# Allegro board TEMA_1.brd
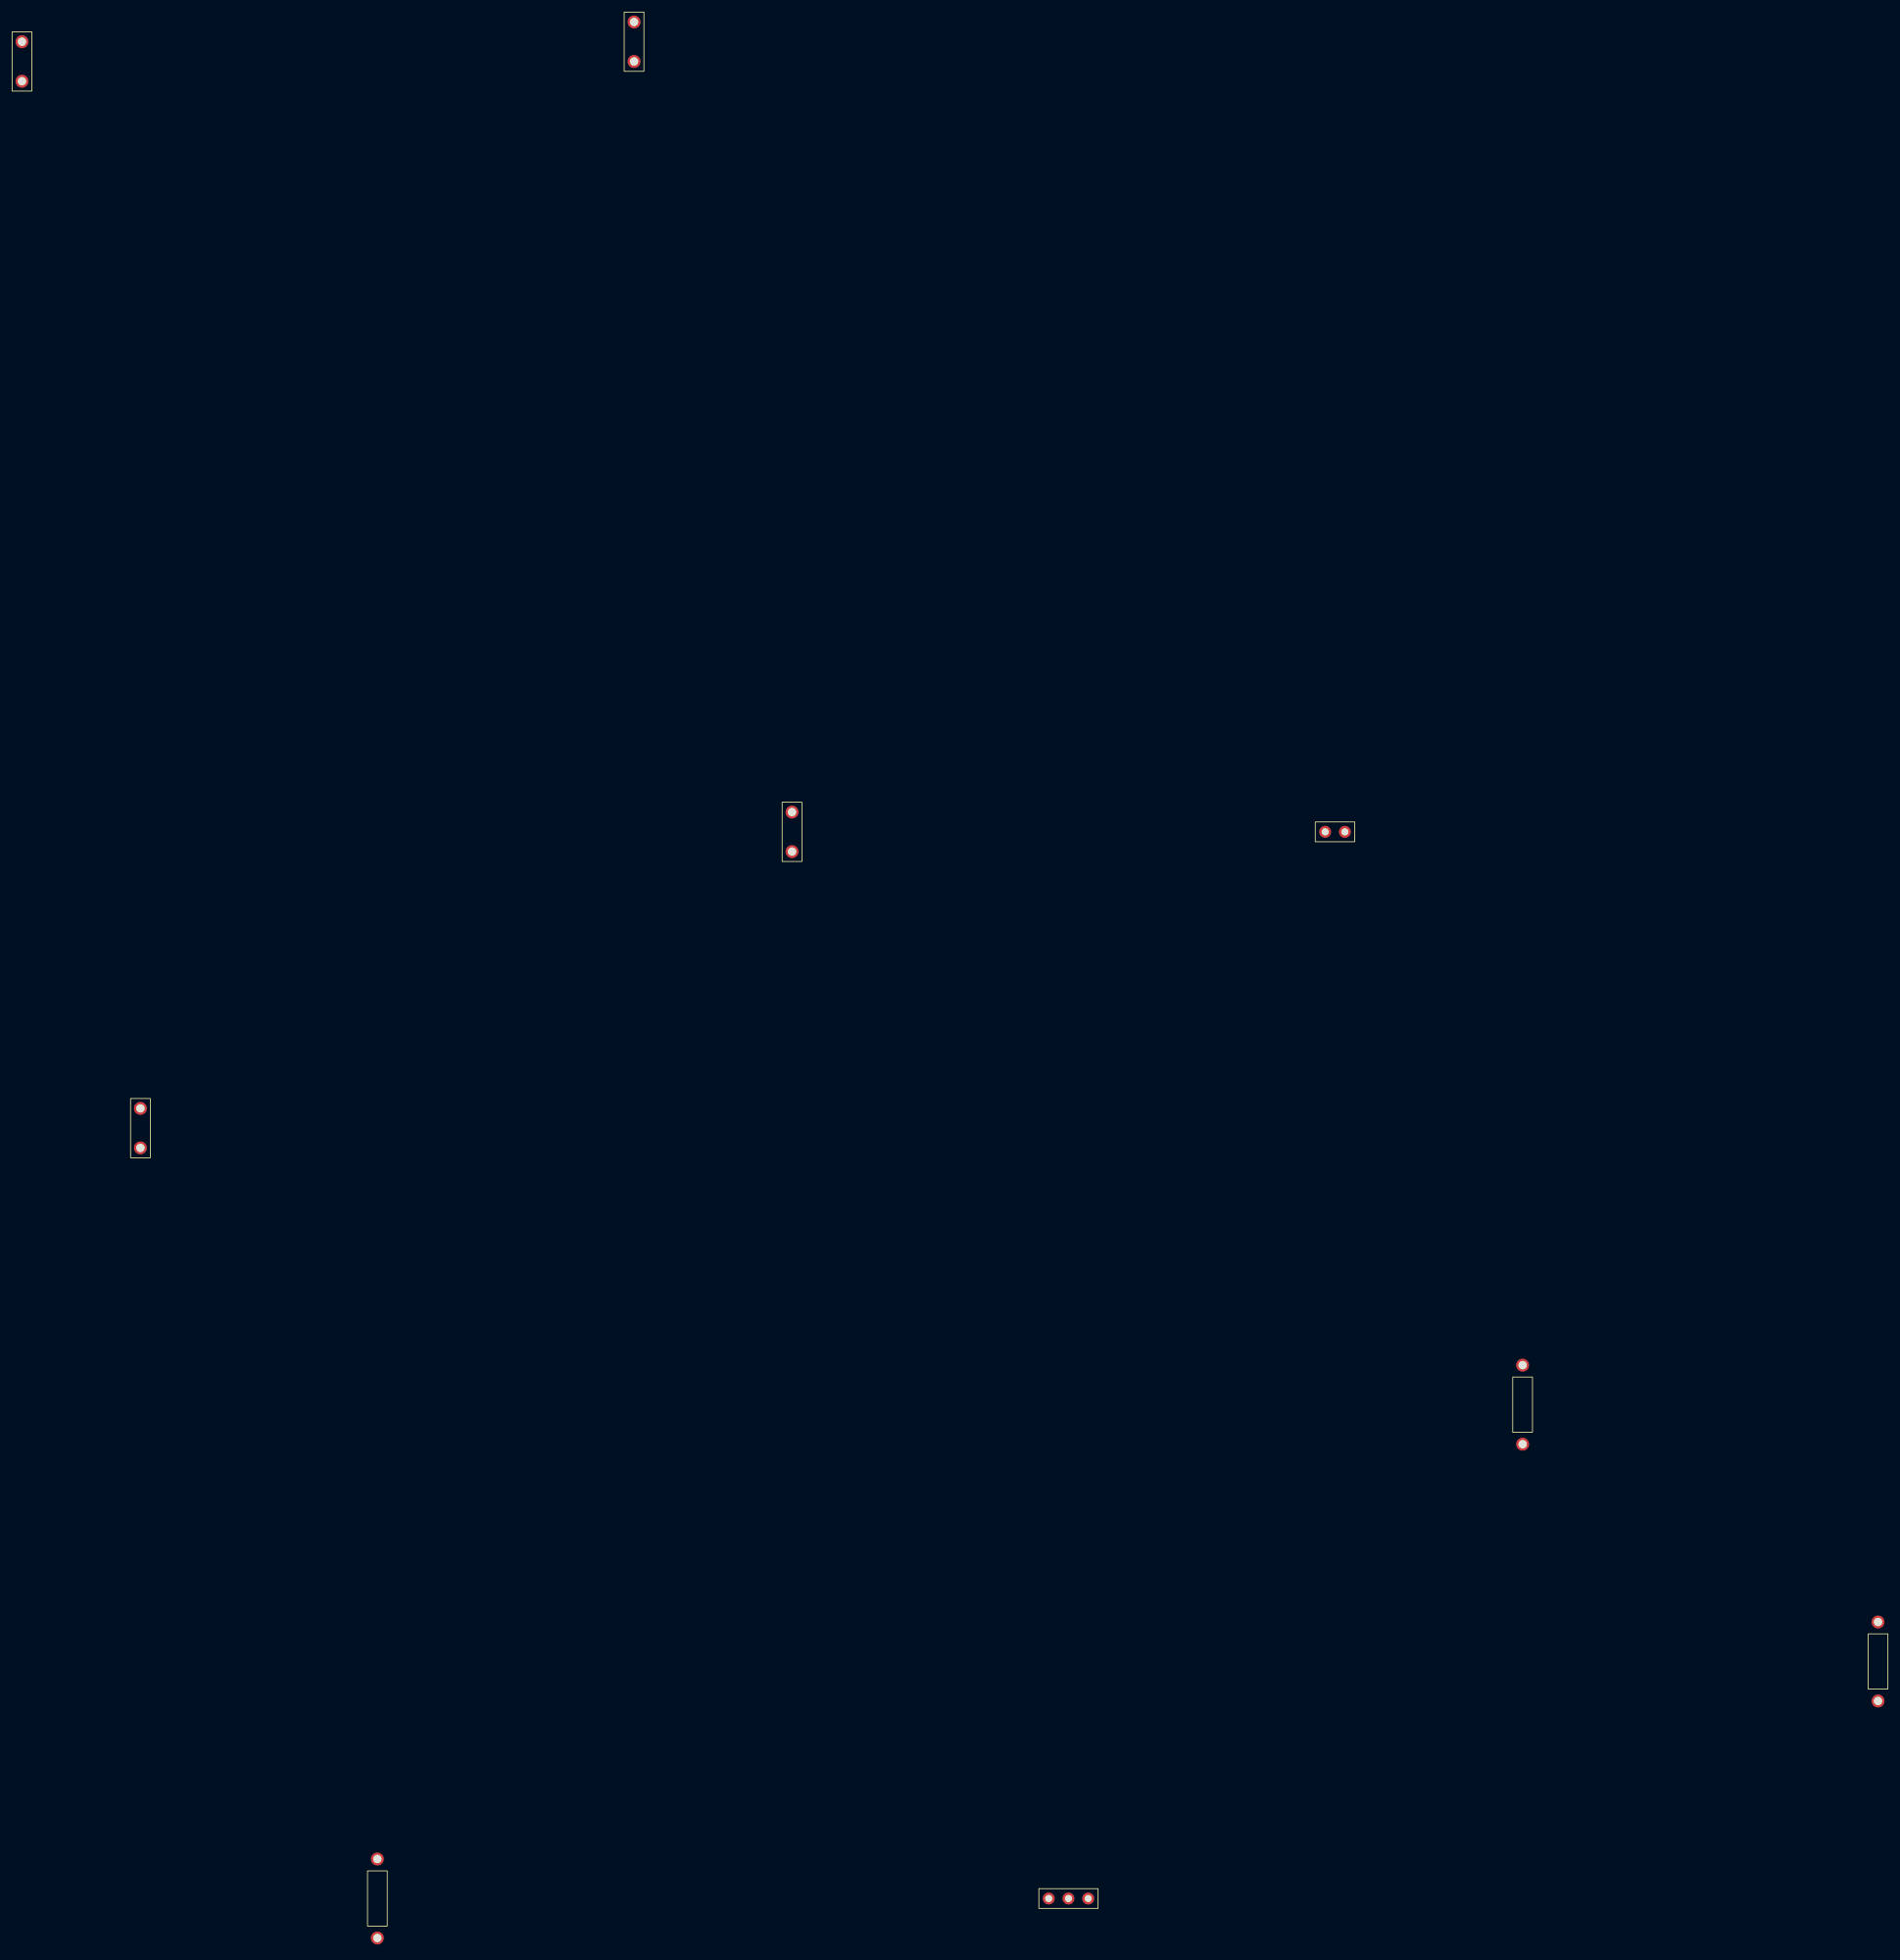
[diagram p0: board, top side]
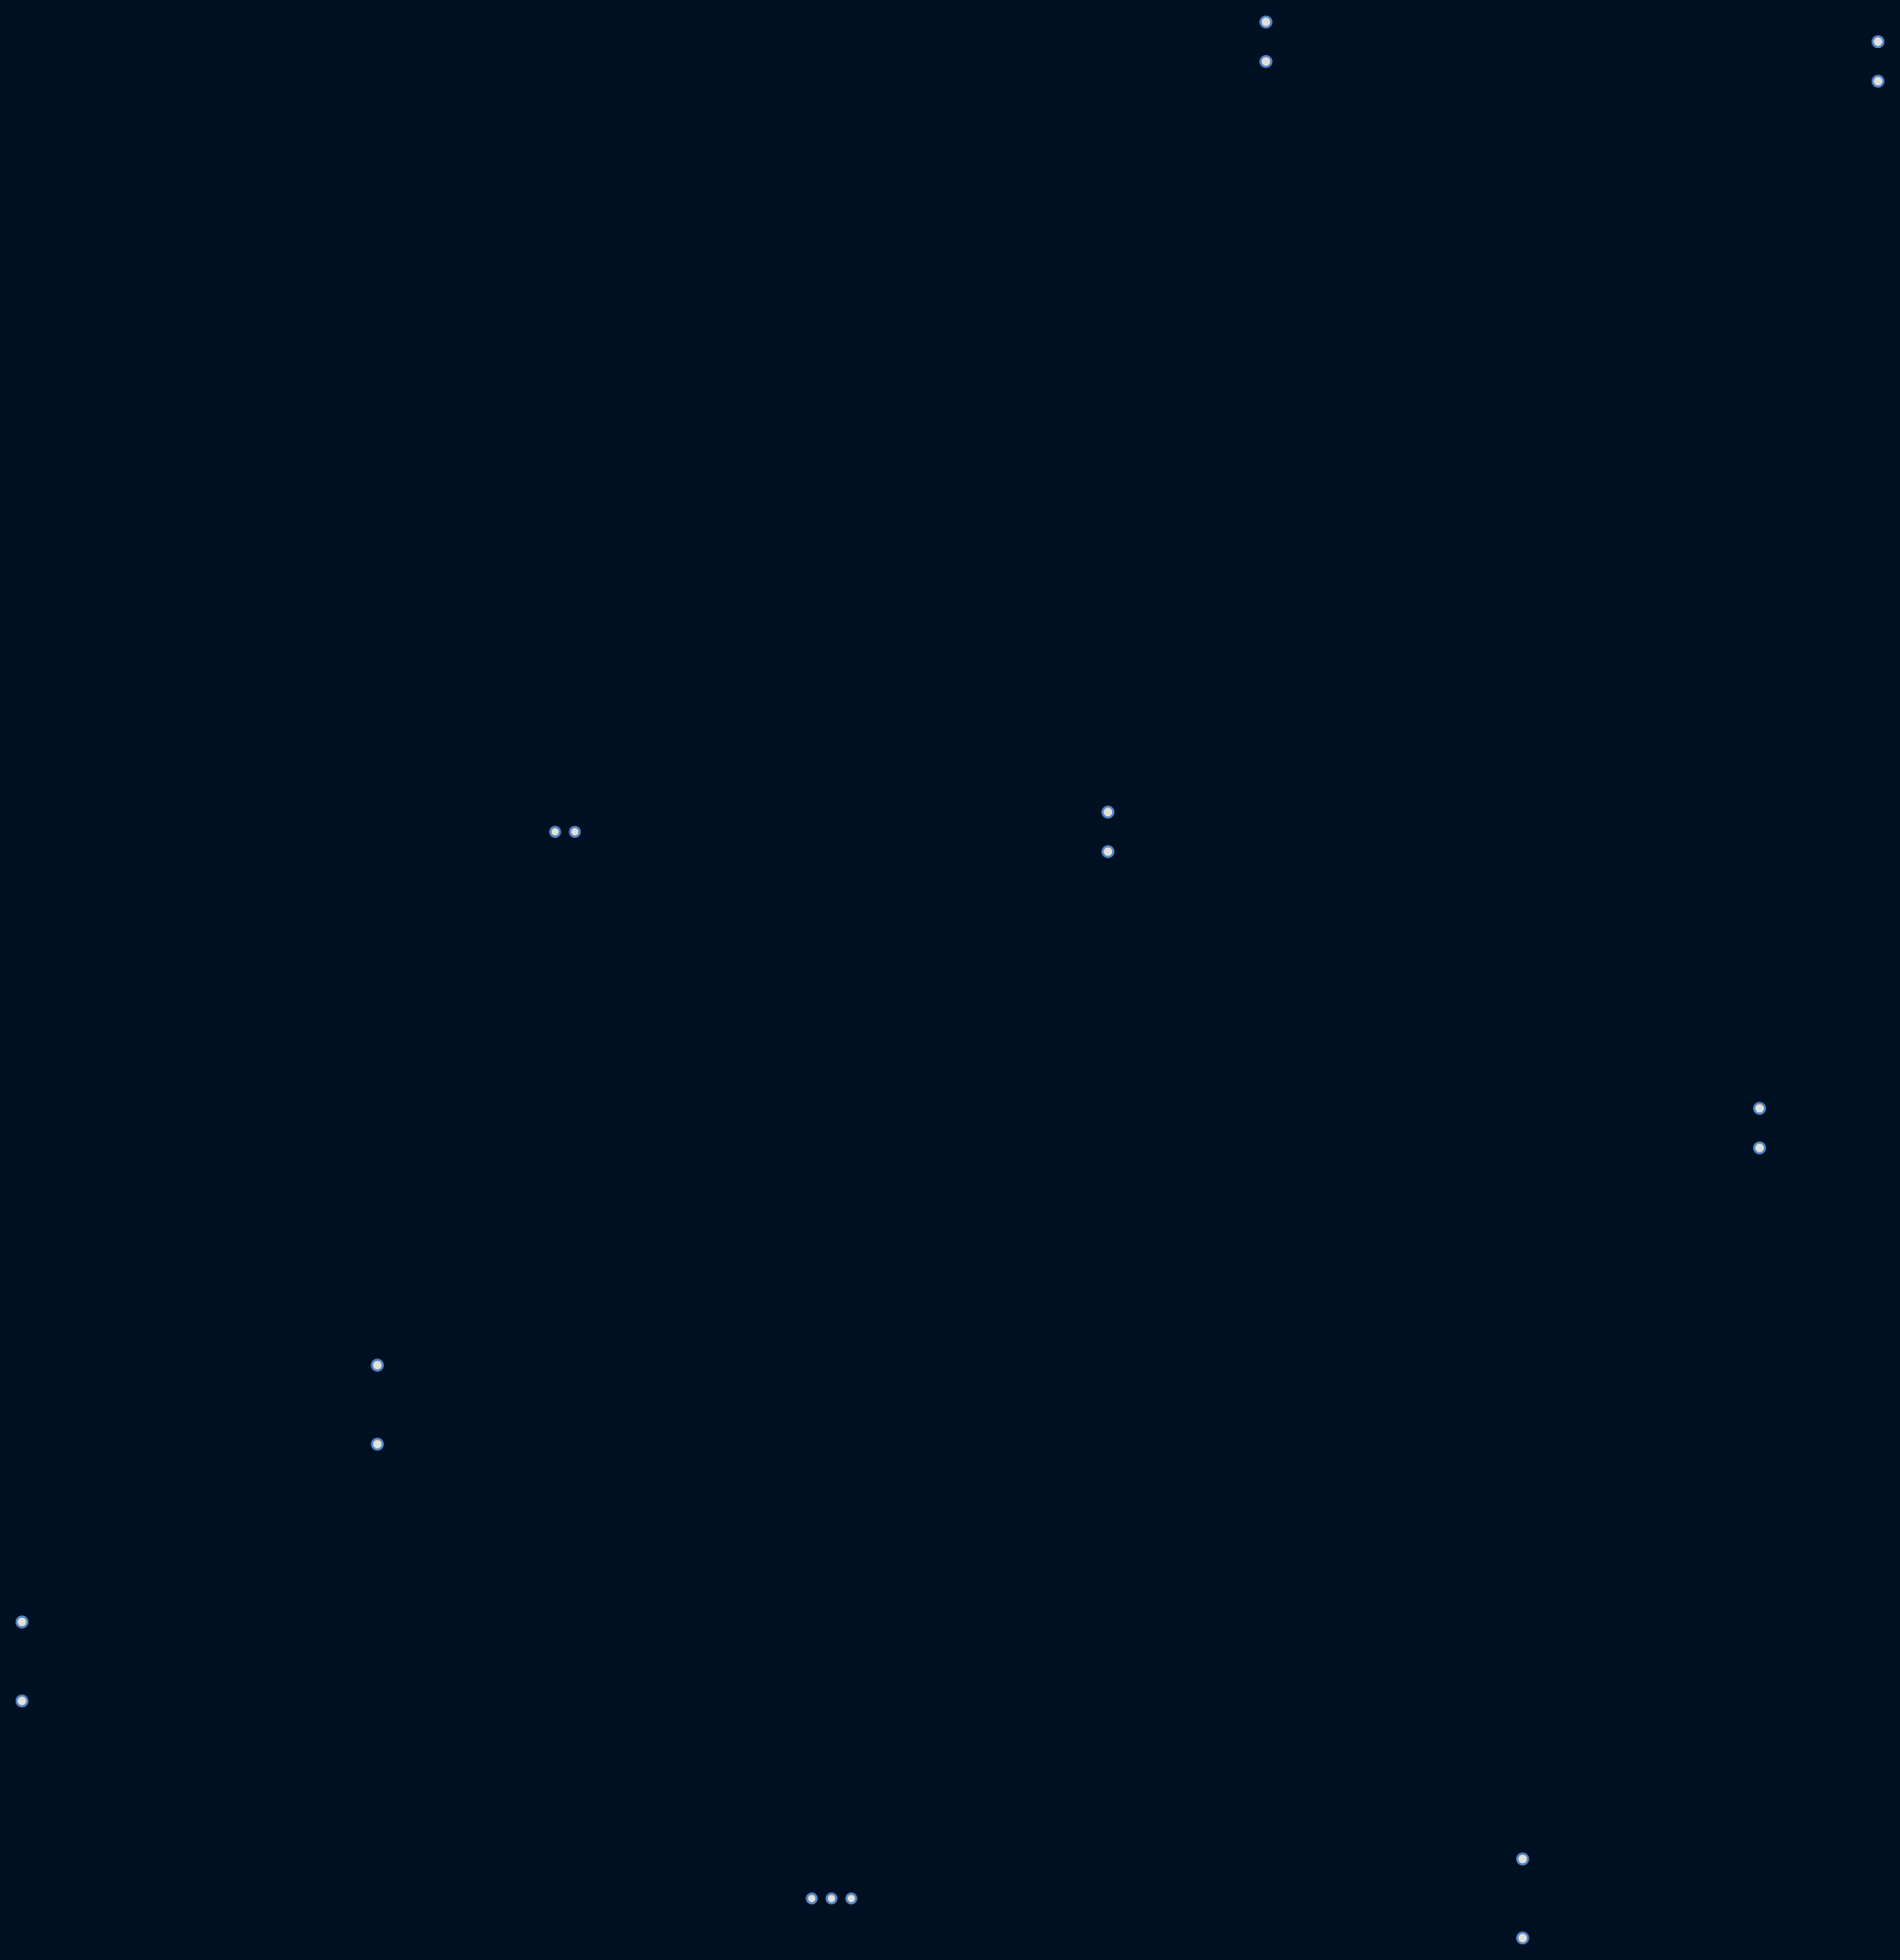
[diagram p1: board, bottom side, seen from below]

No outline. copper layers: TOP, BOTTOM. Coordinates in mm from the lowest, leftmost part position.

## Design rules (mm)
constraint set DEFAULT: min track width 0.127

## Placement (name value [footprint] x y rotation side)
C1  1n  [CAPCK06]  0 238.76 0 top
C2  10n  [CAPCK06]  99.06 139.7 0 top
C4  100n  [CAPCK06]  15.24 101.6 0 top
C5  100n  [CAPCK06]  78.74 241.3 0 top
J1  CON2  [JUMPER2]  167.64 142.24 0 top
J2  CON3  [JUMPER3]  132.08 5.08 0 top
R1  10  [RES400]  45.72 0 0 top
R2  1k  [RES400]  238.76 30.48 0 top
R3  33k  [RES400]  193.04 63.5 0 top

## Library data of the parts
C1 C2 C4 C5 = CAP: Tolerance: ***; User Part Number: ***
J1 = CON2: User Part Number: ***
J2 = CON3: User Part Number: ***
R1-R3 = R: Tolerance: ***; User Part Number: ***

## Footprints (pads in the part's own frame, mm; a bottom-side part is the same pattern mirrored in y, then rotated)
CAPCK06
  round 1.651 hole 1.067: 1(0,0) 2(0,5.08)
JUMPER2
  round 1.524 hole 0.914: 1(0,0) 2(2.54,0)
JUMPER3
  round 1.524 hole 0.914: 1(0,0) 2(2.54,0) 3(5.08,0)
RES400
  round 1.651 hole 1.067: 1(0,0) 2(0,10.16)

## Nets
GND: C1.2 C2.2 C4.2 C5.2 J1.2 J2.1
READ: C5.1 J1.1
N00398: C4.1 J2.2 R1.1
N00486: R1.2 R2.1
N00516: R2.2 R3.1
N00800: C1.1 R3.2
N00883: C2.1

Pads without a net: J2 3
